# Altium PCB LNA_v5_gerber.PcbDoc
Units mm, origin at the board's own origin, x right, y up, seen from the top; angles counter-clockwise.
Board outline 76.71 x 51.69 mm, 2 copper layers (Top Layer, Bottom Layer); 10 components, 12 nets, 21 pads, 209 vias.
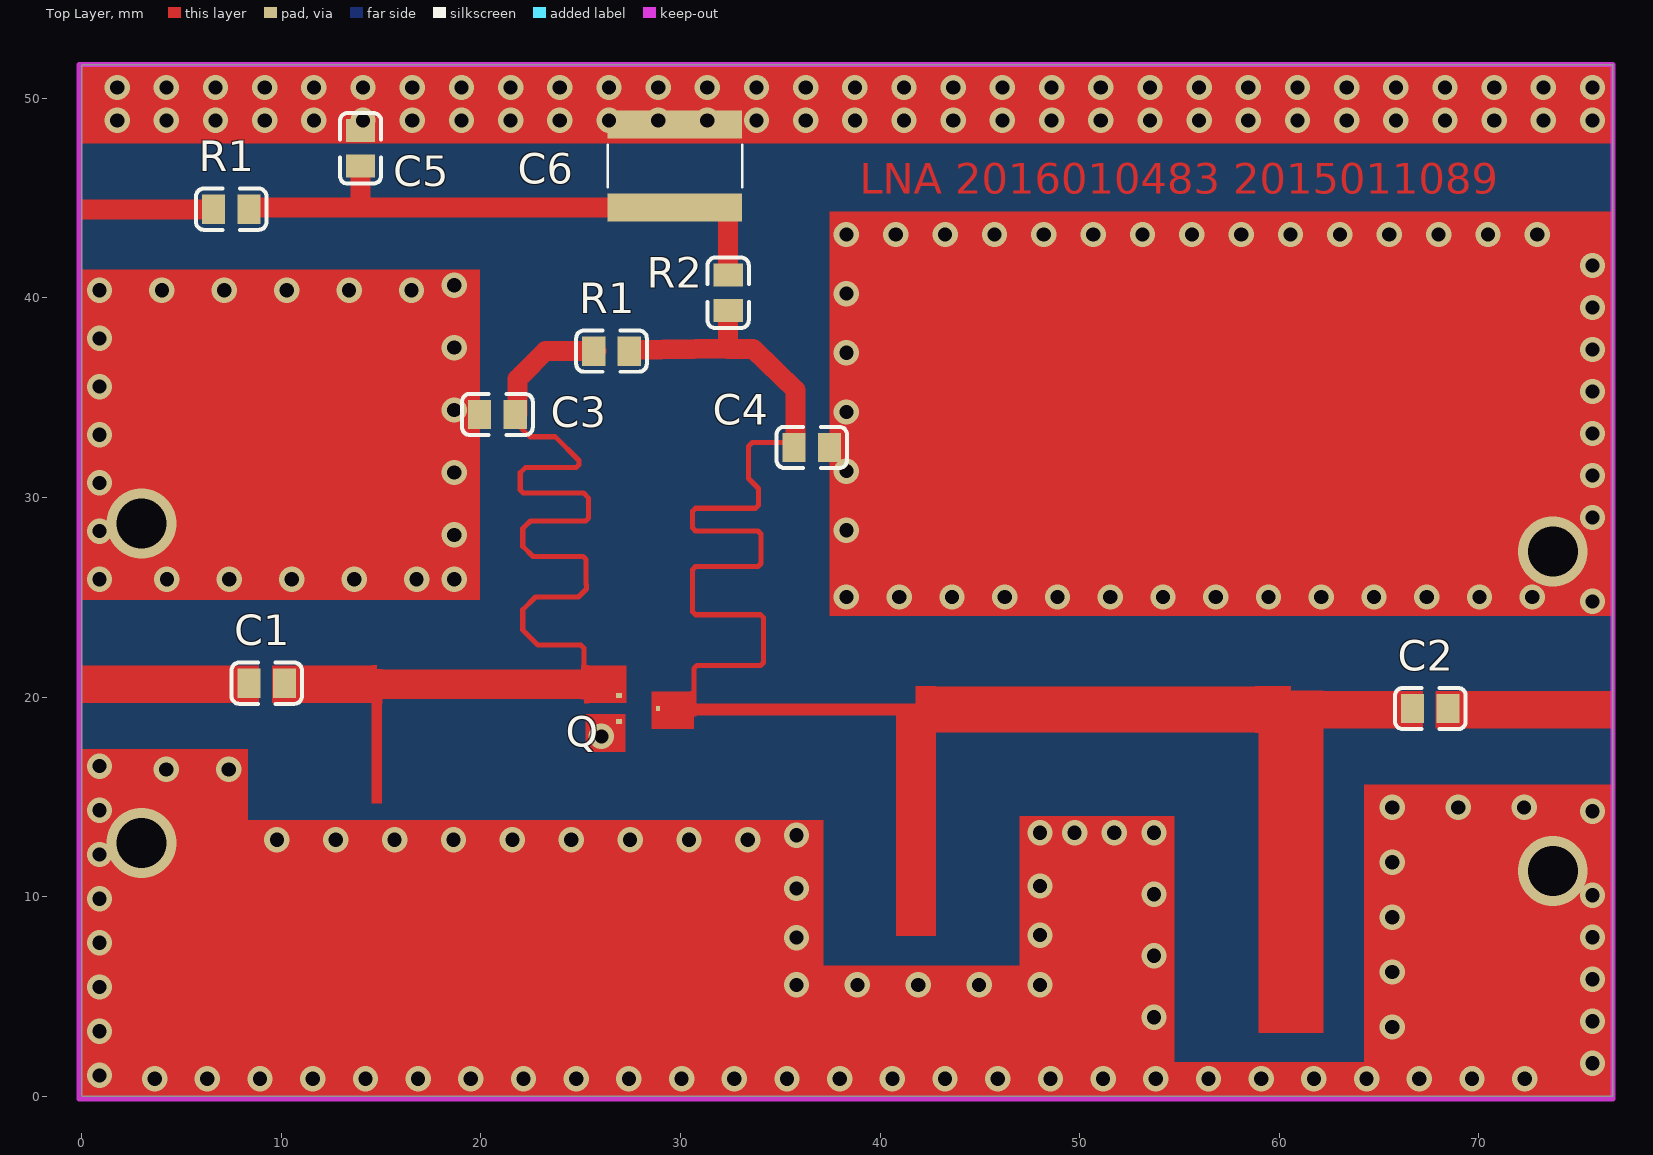
[diagram p0: Top Layer view]
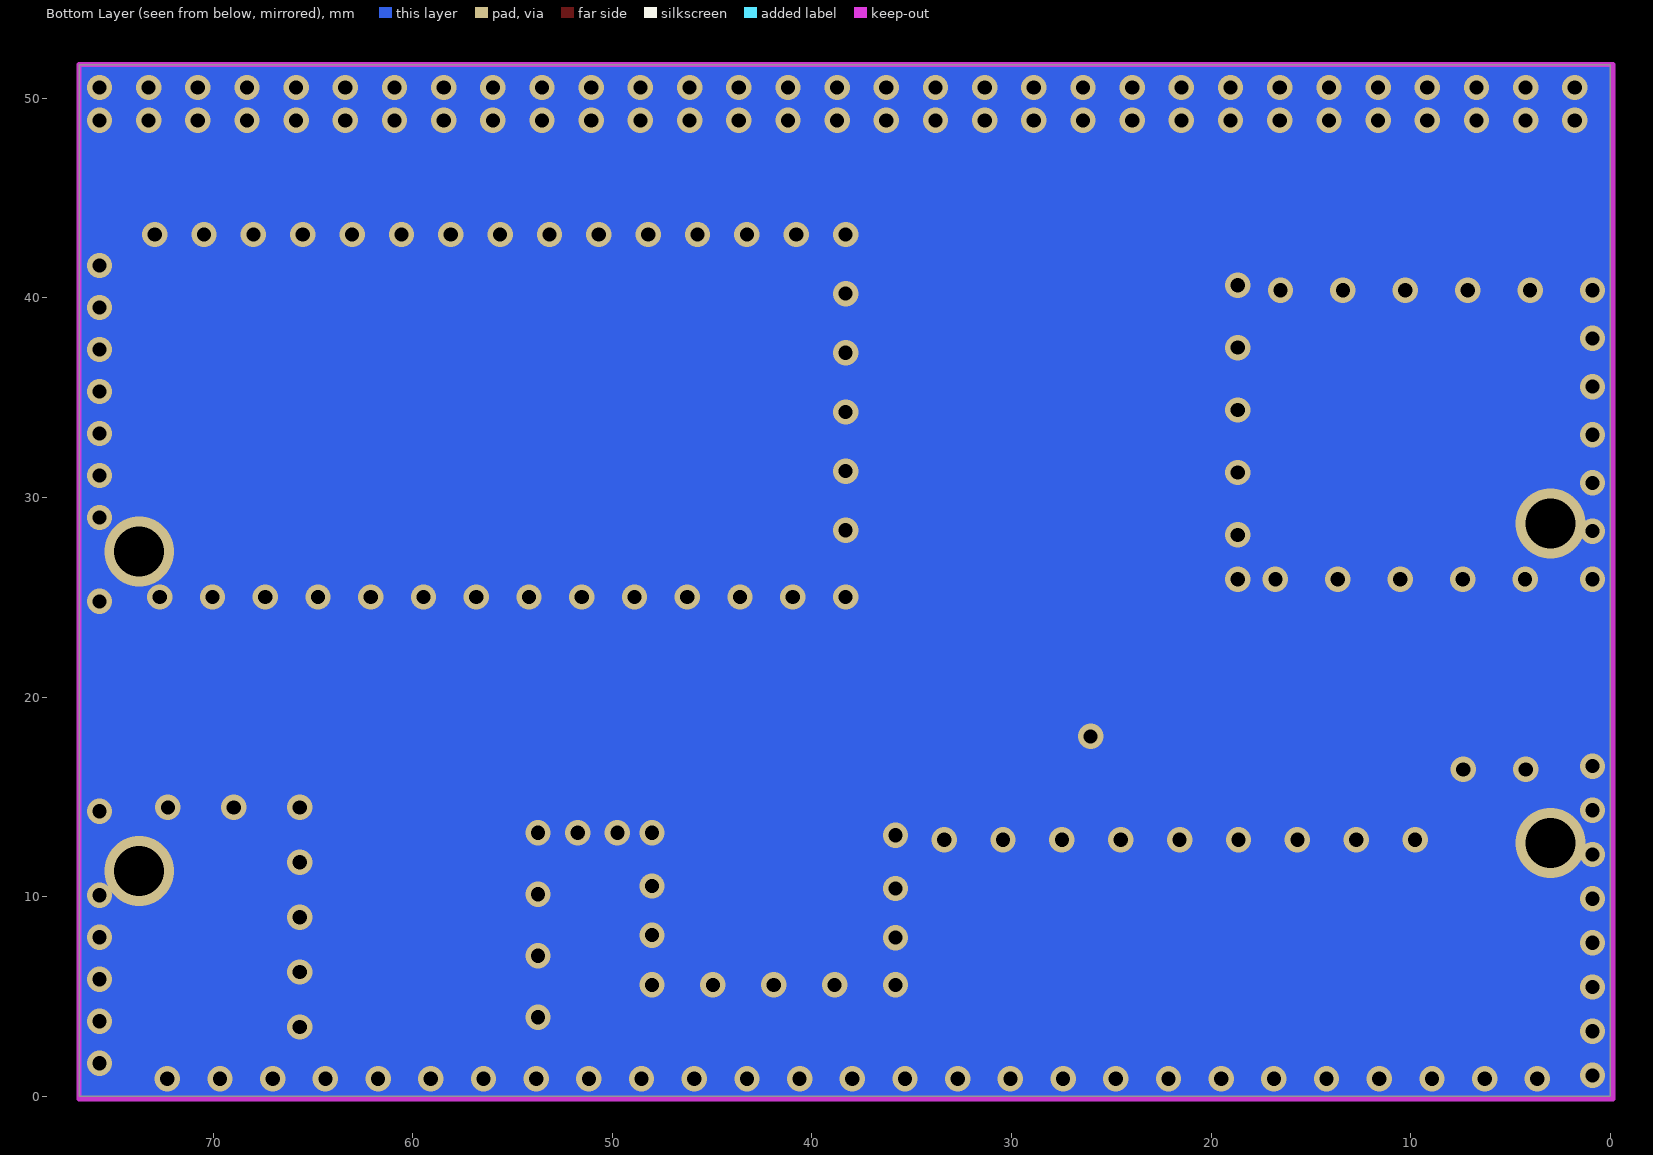
[diagram p1: Bottom Layer view, seen from below]

## Layer stack, top to bottom
Top Solder: solder mask 0.0102, Solder Resist, Dk 3.5
Top Layer: signal copper 0.0356
Dielectric 1: dielectric 0.32, FR-4, Dk 4.8
Bottom Layer: signal copper 0.0356
Bottom Solder: solder mask 0.0102, Solder Resist, Dk 3.5

## Board outline
0,0 76.708,0 76.708,51.689 0,51.689

## Design rules (kind name [scope] priority, off if disabled: settings)
Clearance [All] p1: gap=0.254 ignorepadtopadclearanceinfootprint=FALSE except(0: Arc-Fill Arc-Poly Arc-Region Arc-Hole Track-Fill Track-Poly Track-Region Track-Hole SMDPad-Fill SMDPad-Poly SMDPad-Region SMDPad-Hole THPad-Fill THPad-Poly THPad-Region THPad-Hole Via-Hole Fill-Fill Fill-Poly Fill-Region Fill-Hole Poly-Poly Poly-Region Poly-Hole Region-Region Region-Hole Text-Hole)
PolygonConnect CAM_PolygonConnect_$Net2 [InNet('$Net2')] p1: connectstyle=Direct reliefconductorwidth=0.254 reliefentries=4 polygonreliefangle="90 Angle" airgapwidth=0.254
PolygonConnect [All] p2: connectstyle=Relief reliefconductorwidth=0.254 reliefentries=4 polygonreliefangle="90 Angle" airgapwidth=0.254
RoutingVias [All] p1: holewidth=0.711 width=1.27 viastyle="Through Hole" minholewidth=0.711 minwidth=1.27 maxholewidth=0.711 maxwidth=1.27
ShortCircuit [All] p1: allowed=TRUE
SolderMaskExpansion [All] p1: expansion=0.102
Width [All] p1: maxlimit=1 minlimit=0.254 preferedwidth=0.254 bottomlayer_maxwidth=0.254 minimp=50.000000 maximp=50.000000 favimp=50.000000
29 further rules are at their usual default settings.

## Components (designator, comment, footprint, x,y, rotation, side; value= is the part's Value field where it differs from the comment)
C1 "Comment" 0805_C 9.271,20.701 r180 top
C2 "Comment" 0805_C 67.564,19.431 r180 top
C3 "Comment" 0805_C 20.828,34.163 r0 top
C4 "Comment" 0805_C 36.576,32.512 r0 top
C5 "Comment" 0805_C 13.97,47.497 r90 top
C6 "Comment" *CAPC4563X203N 29.718,46.609 r90 top
Q "Comment" PCBComponent_1 26.924,19.431 r0 top
R1 "Comment" 0805_C 7.493,44.45 r180 top
R1 "Comment" 0805_C 26.543,37.338 r0 top
R2 "Comment" 0805_C 32.385,40.259 r90 top

## Footprints (in the part's own frame and the unit in brackets; to place one, negate y for a bottom-side part, rotate by r counter-clockwise, add the part's x,y. Pads: shape width x height; smd on the part's side, far side on the other; paste and mask are expansions set on the pad)
0805_C [mm]
  rect 1.16x1.47 smd: 1(-0.89,0) 2(0.89,0)
  silkscreen extent -1.77,-1.04 1.77,1.04, body extent -1,-0.62 1,0.63, height 0.77
*CAPC4563X203N [mm]
  rect 1.41x6.74 smd: 1(-2.085,0) 2(2.085,0)
  silkscreen extent -1.06,-3.37 1.06,3.37
PCBComponent_1 [mm]
  rect 0.3x0.25 smd: B(0,0.65) E(0,-0.65)
  rect 0.2x0.25 smd: C(1.95,0)

## Via types
v1: diameter 1.27, hole 0.711, Top Layer to Bottom Layer, 205 vias
v2: diameter 3.5, hole 2.5, Top Layer to Bottom Layer, 4 vias

## Nets (pads, with @x,y where several pads share a name; then routed paths per layer and width w, separated by ;. In a path a pad name is that pad's centre, name@x,y a point inside that pad or via, vN(x,y) a via of type N, cw(c..) or ccw(c..) an arc to the next point about the centre after c; other vN are vias at no path point)
$Net0: 
$Net1: 
$Net2: 
$Net3: 
$Net4: 
$Net5: 
$Net6: 
$Net7: 
$Net8: 
$Net9: 
$Net10: 
$Net11: 
pads on no net: C1.1 C1.2 C2.1 C2.2 C3.1 C3.2 C4.1 C4.2 C5.1 C5.2 C6.1 C6.2 Q.B Q.C Q.E R1.1 R1.2 R2.1 R2.2
copper on no net: | length 115.1
  Top Layer w0.254: 21.717,33.782 22.452,33.047 ; 21.844,35.945 22.03,36.131 ; 23.214,33.047 22.96,33.047 22.452,33.047 ; 25.167,21.59 25.167,22.457 25.018,22.606 22.86,22.606 22.098,23.368 22.098,24.384 22.733,25.019 24.892,25.019 25.295,25.422 25.295,25.632 25.273,25.654 25.273,26.902 25.124,27.051 22.606,27.051 22.098,27.559 22.098,28.448 22.247,28.597 22.479,28.829 22.606,28.829 25.251,28.829 25.4,28.978 25.4,29.972 25.146,30.226 22.12,30.226 21.971,30.375 21.971,31.242 22.225,31.496 24.765,31.496 24.914,31.645 24.914,31.855 23.722,33.047 22.452,33.047 ; 30.669,20.066 30.669,21.441 30.818,21.59 34.014,21.59 34.163,21.739 34.163,21.844 34.163,23.981 34.014,24.13 30.756,24.13 30.607,24.279 30.607,26.394 30.756,26.543 33.887,26.543 34.036,26.692 34.036,28.172 33.887,28.321 30.756,28.321 30.607,28.47 30.607,29.315 30.756,29.464 33.76,29.464 33.909,29.613 33.909,30.458 33.432,30.935 33.401,30.966 33.401,32.565 33.602,32.766 35.56,32.766 35.767,32.973 ; 22.084,33.415 22.093,33.406 ; 22.084,33.415 22.093,33.406 ; 22.084,33.415 22.093,33.406
  Top Layer w1: 8.383,44.524 29.464,44.524 ; 13.97,44.577 13.97,46.482 ; 21.844,34.163 21.844,35.945 ; 22.03,36.131 23.237,37.338 25.78,37.338 ; 27.436,37.39 32.385,37.471 ; 32.258,44.577 32.385,44.45 32.385,42.873 32.385,41.276 ; 32.385,39.243 32.385,37.444 33.336,37.444 33.633,37.454 35.767,35.389 35.767,32.973
  Bottom Layer w0.254: 25.908,32.893 28.067,32.893 28.194,32.766 ; 26.416,29.337 26.86,29.781 27.368,29.781 27.686,30.099 27.644,30.141 27.517,30.141 26.416,31.242
  other v1: 3.656,0.889 6.296,0.889 8.935,0.889 11.575,0.889 14.215,0.889 16.855,0.889 19.494,0.889 22.134,0.889 24.774,0.889 27.414,0.889 30.054,0.889 32.693,0.889 35.333,0.889 37.973,0.889 40.613,0.889 43.253,0.889 45.892,0.889 48.532,0.889 51.172,0.889 53.812,0.889 56.451,0.889 59.091,0.889 61.731,0.889 64.371,0.889 67.011,0.889 69.65,0.889 72.29,0.889 0.889,1.052 0.889,1.052 75.692,1.66 0.889,3.266 65.659,3.48 75.692,3.763 53.721,3.969 0.889,5.479 35.814,5.588 38.862,5.588 41.91,5.588 44.958,5.588 48.006,5.588 75.692,5.867 65.659,6.229 53.721,7.048 0.889,7.693 35.814,7.953 75.692,7.97 48.006,8.08 65.659,8.979 0.889,9.906 75.692,10.074 53.721,10.128 35.814,10.414 48.006,10.541 65.659,11.728 0.889,12.119 9.779,12.859 12.728,12.859 15.677,12.859 18.627,12.859 21.576,12.859 24.525,12.859 27.474,12.859 30.424,12.859 33.373,12.859 35.814,13.081 48.006,13.208 49.742,13.208 51.731,13.208 53.721,13.208 75.692,14.28 0.889,14.333 65.659,14.478 68.961,14.478 72.263,14.478 4.239,16.383 7.366,16.383 0.889,16.546 26.035,18.034 75.692,24.797 38.312,25.019 40.954,25.019 43.597,25.019 46.24,25.019 48.883,25.019 51.526,25.019 54.169,25.019 56.811,25.019 59.454,25.019 62.097,25.019 64.74,25.019 67.383,25.019 70.025,25.019 72.668,25.019 0.889,25.908 4.27,25.908 7.398,25.908 10.525,25.908 13.652,25.908 16.78,25.908 18.669,25.908 18.669,28.13 0.889,28.321 38.312,28.363 75.692,29.004 0.889,30.734 75.692,31.108 18.669,31.258 38.312,31.327 0.889,33.147 75.692,33.211 38.312,34.29 18.669,34.385 75.692,35.314 0.889,35.56 38.312,37.253 75.692,37.418 18.669,37.513 0.889,37.973 75.692,39.521 38.312,40.217 0.889,40.386 4.016,40.386 7.144,40.386 10.271,40.386 13.399,40.386 16.526,40.386 18.669,40.64 75.692,41.624 38.312,43.18 40.784,43.18 43.256,43.18 45.728,43.18 48.201,43.18 50.673,43.18 53.145,43.18 55.618,43.18 58.09,43.18 60.562,43.18 63.034,43.18 65.507,43.18 67.979,43.18 70.451,43.18 72.923,43.18 1.778,48.895 4.242,48.895 6.706,48.895 9.169,48.895 11.633,48.895 14.097,48.895 16.561,48.895 19.025,48.895 21.488,48.895 23.952,48.895 26.416,48.895 28.88,48.895 31.344,48.895 33.807,48.895 36.271,48.895 38.735,48.895 41.199,48.895 43.663,48.895 46.126,48.895 48.59,48.895 51.054,48.895 53.518,48.895 55.982,48.895 58.445,48.895 60.909,48.895 63.373,48.895 65.837,48.895 68.301,48.895 70.764,48.895 73.228,48.895 75.692,48.895 1.778,50.546 4.242,50.546 6.706,50.546 9.169,50.546 11.633,50.546 14.097,50.546 16.561,50.546 19.025,50.546 21.488,50.546 23.952,50.546 26.416,50.546 28.88,50.546 31.344,50.546 33.807,50.546 36.271,50.546 38.735,50.546 41.199,50.546 43.663,50.546 46.126,50.546 48.59,50.546 51.054,50.546 53.518,50.546 55.982,50.546 58.445,50.546 60.909,50.546 63.373,50.546 65.837,50.546 68.301,50.546 70.764,50.546 73.228,50.546 75.692,50.546
  other v2: 73.7,11.3 3,12.7 73.7,27.3 3,28.7

## Keep-outs
Keep-Out Layer:
  lines w0.254: -0.127,-0.127 -0.127,51.689 76.708,51.689 76.708,-0.127 -0.127,-0.127

## Other copper
Top Layer:
  rectangle: 0,43.942 6.603,44.942
  region: 27.24,17.265 27.24,19.147 25.24,19.147 25.24,17.265
  rectangle net $Net1: 30.734,19.085 41.021,19.673
  region net $Net1: 42.794,8.04 42.794,18.415 40.796,18.415 40.796,8.04
  region net $Net1: 58.954,18.219 58.954,20.539 42.545,20.539 42.545,18.219
  region net $Net1: 62.204,3.169 62.204,18.415 58.954,18.415 58.954,3.169
  rectangle net $Net1: 61.849,18.437 67.204,20.32
  region net $Net2: 27.294,19.708 27.294,21.59 25.294,21.59 25.294,19.708
  region net $Net1: 30.542,18.408 30.542,20.29 28.542,20.29 28.542,18.408
  region net $Net2: 25.294,19.899 25.294,21.399 14.859,21.399 14.859,19.899
  region net $Net0: 15.048,14.679 15.048,19.939 14.525,19.939 14.525,14.679
  rectangle: 9.525,19.707 14.732,21.59
  rectangle: 67.818,18.437 76.708,20.32
  rectangle net $Net0: 0,19.707 8.89,21.59
  region: 46.99,14.033 54.737,14.034 54.737,1.715 46.99,1.714
  region: 0,17.399 8.318,17.399 8.318,7.62 0,7.62
  region: 64.262,15.621 76.708,15.621 76.708,0.127 64.262,0.127
  region: 37.084,6.54 53.911,6.54 53.911,1.714 76.708,1.714 76.708,0 37.084,0
  region: 0,13.843 37.14,13.843 37.14,2.632 37.14,0 0,0
  region: 0,51.689 76.708,51.689 76.708,47.752 74.676,47.752 0,47.752
  region: 76.708,44.318 76.708,24.067 37.466,24.067 37.466,40.957 37.466,44.318
  region: 0,41.402 1.397,41.402 19.938,41.402 19.938,24.892 0,24.892
  region net $Net0: 25.4,19.708 25.167,19.708 25.167,19.899 25.04,19.899 25.04,21.59 25.4,21.59
  region net $Net2: 14.786,21.399 15.048,21.399 15.048,19.707 14.525,19.707 14.525,21.59 14.786,21.59
  region net $Net1: 30.796,19.055 30.669,19.055 30.669,18.408 30.48,18.408 30.48,20.29 30.796,20.29
  region net $Net1: 60.579,20.32 62.204,20.32 62.204,18.219 58.801,18.219 58.801,20.539 60.579,20.539
  region net $Net1: 42.799,18.219 40.796,18.219 40.796,19.673 41.795,19.673 41.795,20.539 42.799,20.539
  text "LNA 2016010483 2015011089" at 38.989,45.212 h1.52
Bottom Layer:
  rectangle: 0,0 76.708,51.689